# Altium PCB Register.PcbDoc
Units mil, origin at the board's own origin, x right, y up, seen from the top; angles counter-clockwise.
Board outline 5200 x 2700 mil, 2 copper layers (Top Layer, Bottom Layer); 45 components, 58 nets, 335 pads, 181 vias.
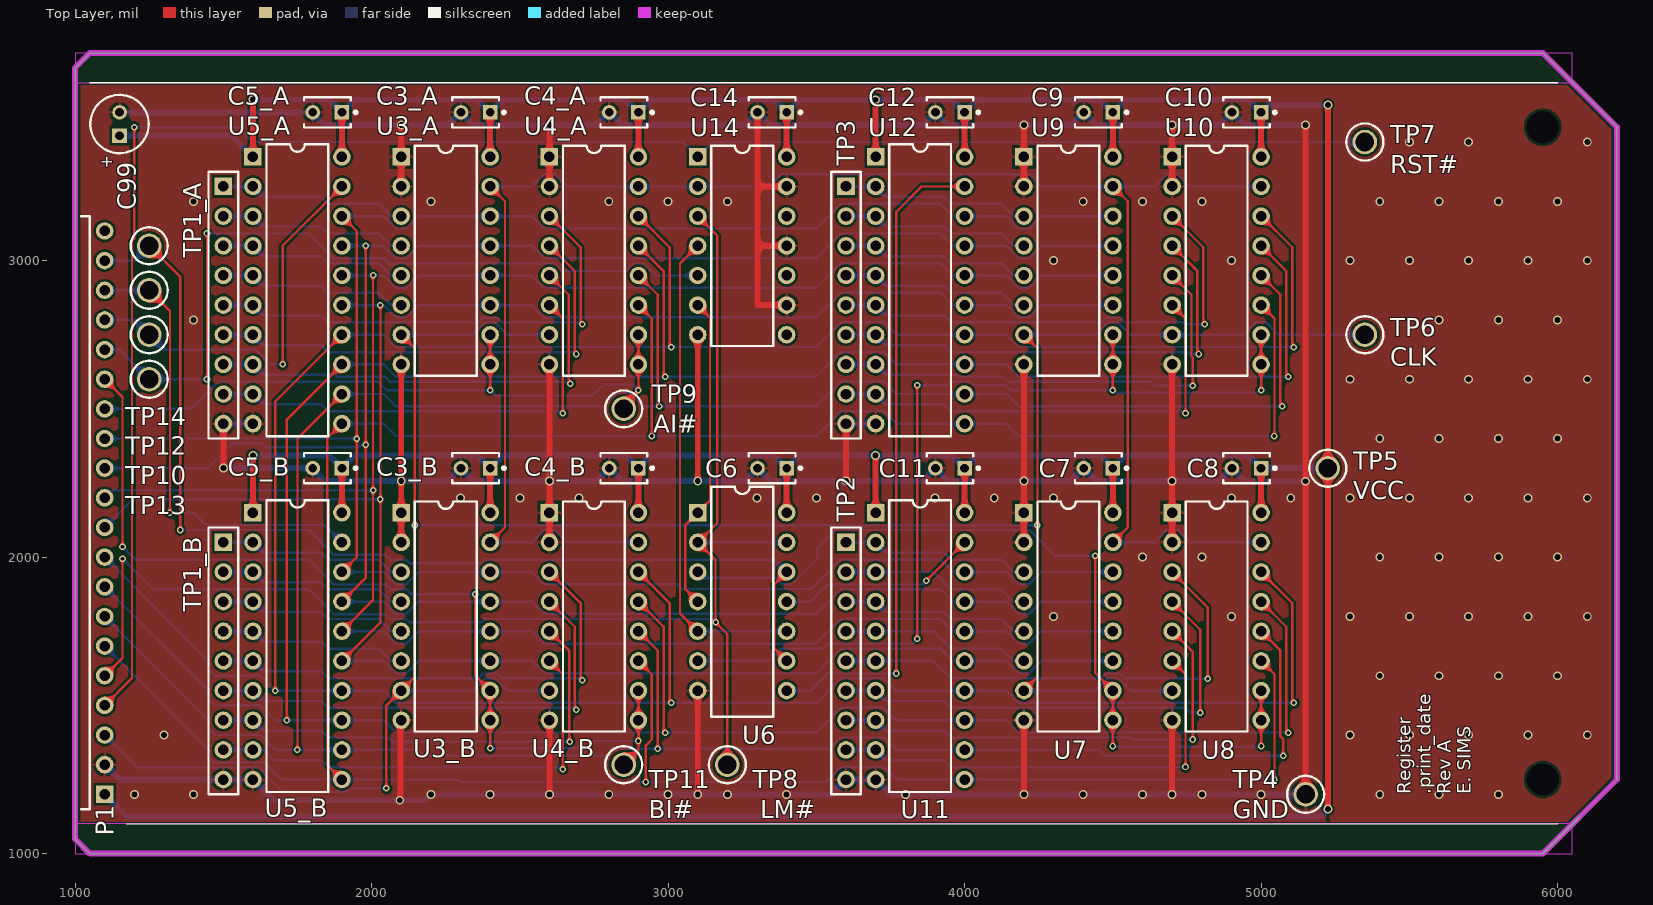
[diagram p0: Top Layer view]
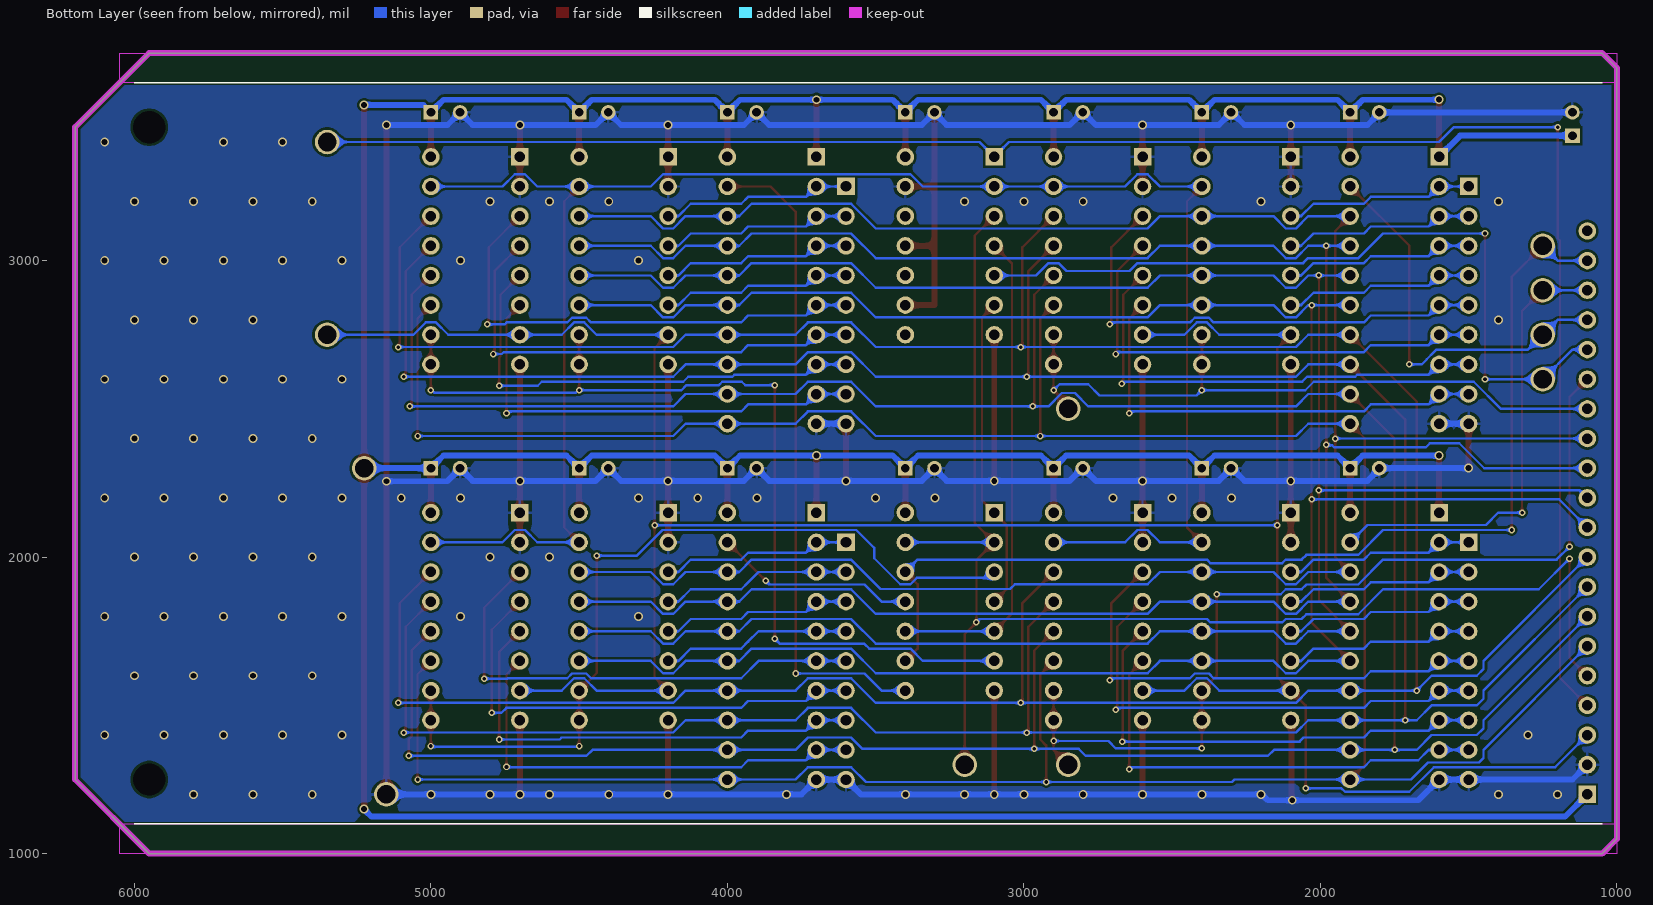
[diagram p1: Bottom Layer view, seen from below]

## Layer stack, top to bottom
Top Solder: solder mask 0.4, Solder Resist, Dk 3.5
Top Layer: signal copper 1.4
Dielectric 1: dielectric 12.6, FR-4, Dk 4.8
Bottom Layer: signal copper 1.4
Bottom Solder: solder mask 0.4, Solder Resist, Dk 3.5

## Board outline
1000,1050 1050,1000 5950,1000 6200,1250 6200,3450 5950,3700 1050,3700 1000,3650

## Design rules (kind name [scope] priority, off if disabled: settings)
BoardOutlineClearance [not isKeepout] p1: gap=10 ignorepadtopadclearanceinfootprint=FALSE
Clearance [All] p1: gap=8 ignorepadtopadclearanceinfootprint=FALSE
HoleSize [All] p1: absolutevalues=TRUE maxlimit=120 minlimit=12 maxpercent=80.000 minpercent=20.000
PolygonConnect [All] p1: thpad.connectstyle=Relief thpad.reliefconductorwidth=10 thpad.reliefentries=4 thpad.polygonreliefangle="90 Angle" thpad.airgapwidth=10 smdpad.connectstyle=Relief smdpad.reliefconductorwidth=10 smdpad.reliefentries=4 smdpad.polygonreliefangle="90 Angle" smdpad.airgapwidth=10 via.connectstyle=Direct via.reliefconductorwidth=10 via.reliefentries=4 via.polygonreliefangle="90 Angle" via.airgapwidth=10
RoutingVias "Schematic Routing Via Style" [InNetClass('PWR')] p1: holewidth=20 width=35 viastyle="Through Hole" minholewidth=20 minwidth=35 maxholewidth=20 maxwidth=50
RoutingVias [All] p2: holewidth=10 width=20 viastyle="Through Hole" minholewidth=10 minwidth=20 maxholewidth=10 maxwidth=20
SilkToSilkClearance [All] p1: silktosilkclearance=5
SolderMaskExpansion [All] p1: expansion=4 istentingtop=FALSE
UnRoutedNet [All] p1: checkbadconnections=TRUE
Width "Schematic Width Constraint" [InNetClass('PWR')] p1: maxlimit=50 minlimit=20 preferedwidth=20
Width [All] p2: maxlimit=8 minlimit=8 preferedwidth=8
27 further rules are at their usual default settings.

## Classes and differential pairs
net class PWR: GND VCC
net class REG[0..15]: REG0 REG1 REG2 REG3 REG4 REG5 REG6 REG7 REG8 REG9 REG10 REG11 REG12 REG13 REG14 REG15
net class BUS[0..7]: BUS0 BUS1 BUS2 BUS3 BUS4 BUS5 BUS6 BUS7
channel class Register_8B: A B
component class HL: C6 C7 C8 C9 C10 C11 C12 TP2 TP3 U6 U7 U8 U9 U10 U11 U12
component class B: C3_B C4_B C5_B TP1_B U3_B U4_B U5_B
component class A: C3_A C4_A C5_A TP1_A U3_A U4_A U5_A
component class Top: C14 C99 P1 TP4 TP5 TP6 TP7 TP8 TP9 TP10 TP11 TP12 TP13 TP14 U14

## Components (designator, comment, footprint, x,y, rotation, side; value= is the part's Value field where it differs from the comment)
C3_A "K104K15X7RF5TL2" VISH-K104K15X7RF5TL2 2350.79,3500 r180 top locked (schematic designator C3)
C3_B "K104K15X7RF5TL2" VISH-K104K15X7RF5TL2 2350.79,2300 r180 top locked (schematic designator C3)
C4_A "K104K15X7RF5TL2" VISH-K104K15X7RF5TL2 2850.79,3500 r180 top locked (schematic designator C4)
C4_B "K104K15X7RF5TL2" VISH-K104K15X7RF5TL2 2850.79,2300 r180 top locked (schematic designator C4)
C5_A "K104K15X7RF5TL2" VISH-K104K15X7RF5TL2 1850.79,3500 r180 top locked (schematic designator C5)
C5_B "K104K15X7RF5TL2" VISH-K104K15X7RF5TL2 1850.79,2300 r180 top locked (schematic designator C5)
C6 "K104K15X7RF5TL2" VISH-K104K15X7RF5TL2 3350.79,2300 r180 top locked
C7 "K104K15X7RF5TL2" VISH-K104K15X7RF5TL2 4450.79,2300 r180 top locked
C8 "K104K15X7RF5TL2" VISH-K104K15X7RF5TL2 4950.79,2300 r180 top locked
C9 "K104K15X7RF5TL2" VISH-K104K15X7RF5TL2 4450.79,3500 r180 top locked
C10 "K104K15X7RF5TL2" VISH-K104K15X7RF5TL2 4950.79,3500 r180 top locked
C11 "K104K15X7RF5TL2" VISH-K104K15X7RF5TL2 3950.79,2300 r180 top locked
C12 "K104K15X7RF5TL2" VISH-K104K15X7RF5TL2 3950.79,3500 r180 top locked
C14 "K104K15X7RF5TL2" VISH-K104K15X7RF5TL2 3350.79,3500 r180 top locked
C99 "Cap Pol5" C5x7 1150,3460.63 r90 top locked value=10uF
P1 "Header 20H" HDR1X20H 1100,1200 r90 top locked
TP1_A "Header 9" HDR1X9 1500,3250 r270 top locked (schematic designator TP1)
TP1_B "Header 9" HDR1X9 1500,2050 r270 top locked (schematic designator TP1)
TP2 "Header 9" HDR1X9 3600,2050 r270 top locked
TP3 "Header 9" HDR1X9 3600,3250 r270 top locked
TP4 "GND" KSTN-5011_V 5150,1200 r0 top
TP5 "VCC" KSTN-5011_V 5225,2300 r0 top
TP6 "CLK" KSTN-5011_V 5350,2750 r0 top
TP7 "RST#" KSTN-5011_V 5350,3400 r0 top
TP8 "LM#" KSTN-5011_V 3200,1300 r0 top
TP9 "AI#" KSTN-5011_V 2850,2500 r0 top
TP10 "AO#" KSTN-5011_V 1250,2750 r0 top
TP11 "BI#" KSTN-5011_V 2850,1300 r0 top
TP12 "BO#" KSTN-5011_V 1250,2900 r0 top
TP13 "HI#" KSTN-5011_V 1250,2600 r0 top
TP14 "HO#" KSTN-5011_V 1250,3050 r0 top
U3_A "SN74LS173AN" N016D 2250,3000 r270 top locked (schematic designator U3)
U3_B "SN74LS173AN" N016D 2250,1800 r270 top locked (schematic designator U3)
U4_A "SN74LS173AN" N016D 2750,3000 r270 top locked (schematic designator U4)
U4_B "SN74LS173AN" N016D 2750,1800 r270 top locked (schematic designator U4)
U5_A "SN74LS245N" N020 1750,2900 r270 top locked (schematic designator U5)
U5_B "SN74LS245N" N020 1750,1700 r270 top locked (schematic designator U5)
U6 "SN74LS00N" N014 3250,1850 r270 top locked
U7 "SN74LS173AN" N016D 4350,1800 r270 top locked
U8 "SN74LS173AN" N016D 4850,1800 r270 top locked
U9 "SN74LS173AN" N016D 4350,3000 r270 top locked
U10 "SN74LS173AN" N016D 4850,3000 r270 top locked
U11 "SN74LS245N" N020 3850,1700 r270 top locked
U12 "SN74LS245N" N020 3850,2900 r270 top locked
U14 "SN74LS04N" N014 3250,3050 r270 top locked

## Footprints (in the part's own frame and the unit in brackets; to place one, negate y for a bottom-side part, rotate by r counter-clockwise, add the part's x,y. Pads: shape width x height; smd on the part's side, far side on the other; paste and mask are expansions set on the pad)
C5x7 [mm] "Capacitor; 2 Leads"
  rect 1.25x1.25 hole 0.75: 1(-1,0)
  round 1.25 hole 0.75: 2(1,0)
  silkscreen extent -2.5,-2.5 2.5,2.5, body extent -2.5,-2.5 2.5,2.5, height 7
HDR1X9 [mm] "Connector; Header; 9 Position"
  rect 1.5x1.5 hole 0.9: 1(0,0)
  round 1.5 hole 0.9: 2(2.54,0) 3(5.08,0) 4(7.62,0) 5(10.16,0) 6(12.7,0) 7(15.24,0) 8(17.78,0) 9(20.32,0)
  silkscreen extent -1.27,-1.27 21.59,1.27
HDR1X20H [mm] "Connector; Header; 20 Position; Right Angle"
  rect 1.5x1.5 hole 0.9: 1(0,0)
  round 1.5 hole 0.9: 2(2.54,0) 3(5.08,0) 4(7.62,0) 5(10.16,0) 6(12.7,0) 7(15.24,0) 8(17.78,0) 9(20.32,0) 10(22.86,0) 11(25.4,0) 12(27.94,0) 13(30.48,0) 14(33.02,0) 15(35.56,0) 16(38.1,0) 17(40.64,0) 18(43.18,0) 19(45.72,0) 20(48.26,0)
  silkscreen extent -1.27,1.27 49.53,2.03
KSTN-5011_V [mm] "Test Point, Dia 3.17mm"
  round 2.1 hole 1.6: 1(0,0)
  silkscreen extent -1.59,-1.58 1.59,1.58, body extent -1.59,-1.59 1.59,1.59, height 8.13
N014 [mm] "DIP; 14 Leads; Row Spacing 7.62 mm; Pitch 2.54 mm"
  rect 1.5x1.5 hole 0.9: 1(-7.62,-3.81)
  round 1.5 hole 0.9: 2(-5.08,-3.81) 3(-2.54,-3.81) 4(0,-3.81) 5(2.54,-3.81) 6(5.08,-3.81) 7(7.62,-3.81) 8(7.62,3.81) 9(5.08,3.81) 10(2.54,3.81) 11(0,3.81) 12(-2.54,3.81) 13(-5.08,3.81) 14(-7.62,3.81)
  silkscreen extent -9.85,-2.65 9.85,2.65, body extent -9.15,-5.08 9.15,5.12, height 7.88
N016D [mm] "DIP; 16 Leads; Row Spacing 7.62 mm; Pitch 2.54 mm"
  rect 1.5x1.5 hole 0.9: 1(-8.89,-3.81)
  round 1.5 hole 0.9: 2(-6.35,-3.81) 3(-3.81,-3.81) 4(-1.27,-3.81) 5(1.27,-3.81) 6(3.81,-3.81) 7(6.35,-3.81) 8(8.89,-3.81) 9(8.89,3.81) 10(6.35,3.81) 11(3.81,3.81) 12(1.27,3.81) 13(-1.27,3.81) 14(-3.81,3.81) 15(-6.35,3.81) 16(-8.89,3.81)
  silkscreen extent -9.85,-2.65 9.85,2.65, body extent -10.46,-5.08 10.46,5.12, height 7.88
N020 [mm] "DIP; 20 Leads; Row Spacing 7.62 mm; Pitch 2.54 mm"
  rect 1.5x1.5 hole 0.9: 1(-11.43,-3.81)
  round 1.5 hole 0.9: 2(-8.89,-3.81) 3(-6.35,-3.81) 4(-3.81,-3.81) 5(-1.27,-3.81) 6(1.27,-3.81) 7(3.81,-3.81) 8(6.35,-3.81) 9(8.89,-3.81) 10(11.43,-3.81) 11(11.43,3.81) 12(8.89,3.81) 13(6.35,3.81) 14(3.81,3.81) 15(1.27,3.81) 16(-1.27,3.81) 17(-3.81,3.81) 18(-6.35,3.81) 19(-8.89,3.81) 20(-11.43,3.81)
  silkscreen extent -12.5,-2.65 12.5,2.65, body extent -13.08,-5.08 13.08,5.12, height 7.88
VISH-K104K15X7RF5TL2 [mm] "THD, 2-Leads, Body 4x2.6mm"
  rect 1.25x1.25 hole 0.75: 1(-1.25,0)
  round 1.25 hole 0.75: 2(1.25,0)
  silkscreen extent -2.55,-1.3 2,1.3, body extent -2,-1.3 2,1.3, height 5.6

## Part data
C3_A C3_B C4_A C4_B C5_A C5_B C6 C7 C8 C9 C10 C11 C12 C14: library part CMP-2000-06508-1, "Ceramic Capacitor, 100 nF, +/- 10%, 50 V, -55 to 125 degC, 2-Pin THD, RoHS, Tape and Reel", Capacitance=0.1µF, Manufacturer=Vishay, Operating Temperature=-55°C~125°C, Package / Case=Radial, Package Description="2-Pin Through Hole Device, Body 4 x 2.6 mm", Ratings=-, Standard Package=1, Temperature Coefficient=X7R, Tolerance=±10%, Voltage - Rated=50V, Applications=GeneralPurpose, Catalog Drawings=Mono-KapSide2-15_5.58Mono-KapSide1_15, Category=Capacitors, Datasheet URL=http://www.vishay.com/docs/45171/kseries.pdf, Datasheet Version=08/2013, Family=CeramicCapacitors, Features=-, Height - Seated (Max)="0.220\"(5.58mm)", Lead Spacing="0.098\"(2.50mm)", Lead Style=Straight, Manufacturer URL=http://www.vishay.com/, Mounting Technology=ThroughHole, Mounting Type=ThroughHole, Online Catalog=Mono-Kap™Series, Other Names=BC1084CT, Package Reference=K104K15X7RF5TL2, Packaging=CutTape(CT), Series=Mono-Kap™K, Size / Dimension="0.157\"Lx0.098\"W(4.00mmx2.50mm)", Thickness (Max)=-
C99: "Polarized Capacitor", LatestRevisionDate=17-Jul-2002, LatestRevisionNote="Re-released for DXP Platform.", PackageDescription="Polarized Capacitor; 2 Leads", PackageReference=POLAR0.8, Published=8-Jun-2000, Publisher="Altium Limited"
P1: "Header, 20-Pin, Right Angle", LatestRevisionDate=17-Jul-2002, LatestRevisionNote="Re-released for DXP Platform.", Publisher="Altium Limited", System=Connector
TP1_A TP1_B TP2 TP3: "Header, 9-Pin", LatestRevisionDate=17-Jul-2002, LatestRevisionNote="Re-released for DXP Platform.", Publisher="Altium Limited"
TP4 TP5 TP6 TP7 TP8 TP9 TP10 TP11 TP12 TP13 TP14: library part TP
U3_A U3_B U4_A U4_B U7 U8 U9 U10: "4-Bit D-Type Register with 3-State Outputs", Code_JEDEC=MS-001-BB, ComponentLink1Description="Manufacturer Link", ComponentLink1URL=http://www.ti.com/, ComponentLink2Description=Datasheet, ComponentLink2URL=http://www-s.ti.com/sc/ds/sn74ls173a.pdf, DatasheetVersion=Mar-1988, LatestRevisionDate=04-Mar-2005, LatestRevisionNote="Stylized 3D Model Added.", PackageDescription="DIP; 16 Leads; Row Spacing 7.62 mm; Pitch 2.54 mm", PackageReference=N016D, PackageVersion=Oct-1995, Published=8-Jun-2000, Publisher="Altium Limited"
U5_A U5_B U11 U12: "Octal Bus Transceiver with 3-State Outputs", ComponentLink1Description="Manufacturer Link", ComponentLink1URL=http://www.ti.com/, ComponentLink2Description=Datasheet, ComponentLink2URL=http://www-s.ti.com/sc/ds/sn74ls245.pdf, DatasheetVersion=Mar-1988, LatestRevisionDate=04-Mar-2005, LatestRevisionNote="Stylized 3D Model Added.", PackageDescription="DIP; 20 Leads; Row Spacing 7.62 mm; Pitch 2.54 mm", PackageReference=N020, PackageVersion=Oct-1995, Published=8-Jun-2000, Publisher="Altium Limited"
U6: "Quadruple 2-Input Positive-NAND Gate", ComponentLink1Description="Manufacturer Link", ComponentLink1URL=http://www.ti.com/, ComponentLink2Description=Datasheet, ComponentLink2URL=http://www-s.ti.com/sc/ds/sn74ls00.pdf, DatasheetVersion=Mar-1988, LatestRevisionDate=04-Mar-2005, LatestRevisionNote="Stylized 3D Model Added.", PackageDescription="DIP; 14 Leads; Row Spacing 7.62 mm; Pitch 2.54 mm", PackageReference=N014, PackageVersion=Oct-1995, Published=8-Jun-2000, Publisher="Altium Limited"
U14: "Hex Inverter", ComponentLink1Description="Manufacturer Link", ComponentLink1URL=http://www.ti.com/, ComponentLink2Description=Datasheet, ComponentLink2URL=http://www-s.ti.com/sc/ds/sn74ls04.pdf, DatasheetVersion=Mar-1988, LatestRevisionDate=04-Mar-2005, LatestRevisionNote="Stylized 3D Model Added.", PackageDescription="DIP; 14 Leads; Row Spacing 7.62 mm; Pitch 2.54 mm", PackageReference=N014, PackageVersion=Oct-1995, Published=8-Jun-2000, Publisher="Altium Limited"

## Free pads (board coordinates)
  round 0 hole 109: ""(5950,1250) ""(5950,3450)

## Via types
v1: diameter 30, hole 20, Top Layer to Bottom Layer, tented both sides, 113 vias
v2: diameter 22, hole 12, Top Layer to Bottom Layer, tented both sides, 68 vias

## Nets (pads, with @x,y where several pads share a name; then routed paths per layer and width w, separated by ;. In a path a pad name is that pad's centre, name@x,y a point inside that pad or via, vN(x,y) a via of type N, cw(c..) or ccw(c..) an arc to the next point about the centre after c; other vN are vias at no path point)
AI#: P1.14 TP9.1 U3_A.9 U3_A.10 U4_A.9 U4_A.10 | length 2339.1
  Top Layer w8: v2(2400,2563) U3_A.9 U3_A.10 ; TP9.1 2850,2513 v2(2900,2563) U4_A.9 U4_A.10
  Bottom Layer w8: P1.14 1391.27,2500 1482.8,2591.53 1517.2,2591.53 2022.37,2591.53 2050.9,2563 v2(2400,2563) 2418,2545 2745,2545 2783.2,2583.2 2879.8,2583.2 v2(2900,2563)
AO#: P1.17 TP10.1 U5_A.19 | length 1345.1
  Top Layer w8: v2(1700,2650) 1700,3050 U5_A.19
  Bottom Layer w8: P1.17 1200,2800 TP10.1 1300,2700 1608.52,2700 1616.99,2691.53 1617.2,2691.53 1641.53,2667.2 1641.53,2666.99 1658.52,2650 v2(1700,2650)
BI#: P1.15 TP11.1 U3_B.9 U3_B.10 U4_B.9 U4_B.10 | length 3167.9
  Top Layer w8: P1.15 1160,2540 v2(1160,2035) ; v2(2350,1875) 2350,1600 U3_B.10 v2(2400,1355) ; TP11.1 2900,1350 v2(2900,1380) U4_B.9 U4_B.10
  Bottom Layer w8: v2(1160,2035) 1203.47,1991.53 1788.47,1991.53 1872.47,1907.53 2047.47,1907.53 2063.47,1891.53 2117.2,1891.53 2133.73,1875 v2(2350,1875) ; v2(2400,1355) 2690,1355 2715,1380 v2(2900,1380)
BO#: P1.18 TP12.1 U5_B.19 | length 1550.4
  Top Layer w8: TP12.1 1320,2830 v2(1320,2150)
  Bottom Layer w8: P1.18 TP12.1 ; v2(1320,2150) 1400,2150 1441.53,2108.47 1841.53,2108.47 U5_B.19
BUS0: P1.13 U3_A.14 U3_B.14 U5_A.18 U5_B.18 U7.14 U9.14 U11.18 U12.18 | length 7579.9
  Top Layer w8: U5_B.18 1950,2000 v2(1950,2400) 1950,3100 U5_A.18
  Bottom Layer w8: P1.13 v2(1950,2400) ; U5_B.18 2041.27,1950 2082.8,1908.47 2117.2,1908.47 2158.73,1950 U3_B.14 2541.27,1950 2582.8,1908.47 3030.47,1908.47 3046.47,1892.47 3483.74,1892.47 3582.8,1991.53 3918.47,1991.53 3960,1950 U11.18 4141.27,1950 4182.8,1908.47 4217.2,1908.47 4258.73,1950 U7.14 ; U5_A.18 2041.27,3150 2082.8,3108.47 2117.2,3108.47 2158.73,3150 U3_A.14 2541.27,3150 2582.8,3108.47 3499.74,3108.47 3582.8,3191.53 3918.47,3191.53 3960,3150 U12.18 4141.27,3150 4182.8,3108.47 4217.2,3108.47 4258.73,3150 U9.14
BUS1: P1.12 U3_A.13 U3_B.13 U5_A.17 U5_B.17 U7.13 U9.13 U11.17 U12.17 | length 7632.9
  Top Layer w8: U5_B.17 1980,1930 v2(1980,3050)
  Bottom Layer w8: P1.12 1447.67,2300 1531.67,2384 1631,2384 1645,2370 1953,2370 1959.83,2376.83 1977.32,2376.83 v2(1980,2379.51) ; U5_B.17 2041.27,1850 2082.8,1808.47 2117.2,1808.47 2158.73,1850 U3_B.13 2541.27,1850 2582.8,1808.47 3499.74,1808.47 3582.8,1891.53 3918.47,1891.53 3960,1850 U11.17 4141.27,1850 4182.8,1808.47 4217.2,1808.47 4258.73,1850 U7.13 ; U5_A.17 v2(1980,3050) 2041.27,3050 2082.8,3008.47 2117.2,3008.47 2158.73,3050 U3_A.13 2541.27,3050 2582.8,3008.47 3499.74,3008.47 3582.8,3091.53 3918.47,3091.53 3960,3050 U12.17 4141.27,3050 4182.8,3008.47 4217.2,3008.47 4258.73,3050 U9.13
BUS2: P1.11 U3_A.12 U3_B.12 U5_A.16 U5_B.16 U7.12 U9.12 U11.16 U12.16 | length 7634.1
  Top Layer w8: U5_B.16 2005,1855 v2(2005,2950)
  Bottom Layer w8: P1.11 1125,2225 v2(2005,2225) ; U5_B.16 2041.27,1750 2082.8,1708.47 2117.2,1708.47 2158.73,1750 U3_B.12 2541.27,1750 2582.8,1708.47 3499.74,1708.47 3582.8,1791.53 3918.47,1791.53 3960,1750 U11.16 4141.27,1750 4182.8,1708.47 4217.2,1708.47 4258.73,1750 U7.12 ; U5_A.16 v2(2005,2950) 2041.27,2950 2082.8,2908.47 2117.2,2908.47 2158.73,2950 U3_A.12 2541.27,2950 2582.8,2908.47 3499.74,2908.47 3582.8,2991.53 3918.47,2991.53 3960,2950 U12.16 4141.27,2950 4182.8,2908.47 4217.2,2908.47 4258.73,2950 U9.12
BUS3: P1.10 U3_A.11 U3_B.11 U5_A.15 U5_B.15 U7.11 U9.11 U11.15 U12.15 | length 7698.4
  Top Layer w8: U5_B.15 2030,1780 v2(2030,2195) v2(2030,2850)
  Bottom Layer w8: P1.10 1195,2195 v2(2030,2195) ; U5_B.15 2041.27,1650 2082.8,1608.47 2117.2,1608.47 2158.73,1650 U3_B.11 2541.27,1650 2582.8,1608.47 3499.74,1608.47 3582.8,1691.53 3918.47,1691.53 3960,1650 U11.15 4141.27,1650 4182.8,1608.47 4217.2,1608.47 4258.73,1650 U7.11 ; U5_A.15 v2(2030,2850) 2041.27,2850 2082.8,2808.47 2117.2,2808.47 2158.73,2850 U3_A.11 2541.27,2850 2582.8,2808.47 3499.74,2808.47 3582.8,2891.53 3918.47,2891.53 3960,2850 U12.15 4141.27,2850 4182.8,2808.47 4217.2,2808.47 4258.73,2850 U9.11
BUS4: P1.9 U4_A.14 U4_B.14 U5_A.14 U5_B.14 U8.14 U10.14 U11.14 U12.14 | length 10838.6
  Top Layer w8: v2(1675,1550) 1675,2525 U5_A.14 ; U4_B.14 3005,1845 3005,1514.16 v2(3010.68,1508.47) ; U4_A.14 3005,3045 3005,2714.16 v2(3010.68,2708.47) ; U8.14 5105,1845 5105,1514.16 v2(5110.68,1508.47) ; U10.14 5105,3045 5105,2714.16 v2(5110.68,2708.47)
  Bottom Layer w8: P1.9 1450,1650 1450,1622.51 1472.51,1600 1625,1600 v2(1675,1550) U5_B.14 2041.27,1550 2082.8,1508.47 3499.74,1508.47 3582.8,1591.53 3728.47,1591.53 3770,1550 U11.14 4141.27,1550 4182.8,1508.47 v2(5110.68,1508.47) ; U5_A.14 2041.27,2750 2082.8,2708.47 v2(3010.68,2708.47) 3499.74,2708.47 3582.8,2791.53 3728.47,2791.53 3770,2750 U12.14 4141.27,2750 4182.8,2708.47 v2(5110.68,2708.47)
BUS5: P1.8 U4_A.13 U4_B.13 U5_A.13 U5_B.13 U8.13 U10.13 U11.13 U12.13 | length 10750
  Top Layer w8: v2(1714.49,1450) 1714.49,2464.49 U5_A.13 ; U4_B.13 2985,1765 2985,1414.4 v2(2990.92,1408.47) ; U4_A.13 2985,2965 2985,2614.4 v2(2990.92,2608.47) ; U8.13 5085,1765 5085,1414.4 v2(5090.92,1408.47) ; U10.13 5085,2965 5085,2614.4 v2(5090.92,2608.47)
  Bottom Layer w8: P1.8 1450,1550 1450,1522.51 1472.51,1500 1625,1500 1675,1450 v2(1714.49,1450) U5_B.13 2041.27,1450 2082.8,1408.47 3499.74,1408.47 3582.8,1491.53 3728.47,1491.53 3770,1450 U11.13 4141.27,1450 4182.8,1408.47 v2(5090.92,1408.47) ; U5_A.13 2041.27,2650 2082.8,2608.47 v2(2990.92,2608.47) 3499.74,2608.47 3582.8,2691.53 3728.47,2691.53 3770,2650 U12.13 4141.27,2650 4182.8,2608.47 v2(5090.92,2608.47)
BUS6: P1.7 U4_A.12 U4_B.12 U5_A.12 U5_B.12 U8.12 U10.12 U11.12 U12.12 | length 10607.6
  Top Layer w8: v2(1750,1350) 1750,2400 U5_A.12 ; U4_B.12 2965,1685 v2(2965,1353.34) ; U4_A.12 2965,2885 2965,2514.08 v2(2970.6,2508.47) ; U8.12 5065,1685 5065,1395.51 5074.08,1386.44 v2(5074.08,1330) ; U10.12 5065,2885 5065,2514.08 v2(5070.6,2508.47)
  Bottom Layer w8: P1.7 1450,1450 1450,1422.51 1472.51,1400 1625,1400 1675,1350 v2(1750,1350) U5_B.12 2156.67,1350 2176.67,1330 2791.76,1330 2815.1,1353.34 v2(2965,1353.34) 3544.61,1353.34 3582.8,1391.53 3728.47,1391.53 3770,1350 U11.12 4455,1350 4475,1330 v2(5074.08,1330) ; U5_A.12 2041.27,2550 2082.8,2508.47 2783.04,2508.47 2827.91,2553.34 2872.09,2553.34 2916.96,2508.47 v2(2970.6,2508.47) 3499.74,2508.47 3582.8,2591.53 3728.47,2591.53 3770,2550 U12.12 4141.27,2550 4182.8,2508.47 v2(5070.6,2508.47)
BUS7: P1.6 U4_A.11 U4_B.11 U5_A.11 U5_B.11 U8.11 U10.11 U11.11 U12.11 | length 10435.2
  Top Layer w8: U5_B.11 1850.79,1299.21 1850.79,2400.79 U5_A.11 ; U4_B.11 2945,1605 2945,1385 2925,1365 2925,1241.98 v2(2924.57,1241.55) ; U4_A.11 2945,2805 v2(2945,2408.47) ; U8.11 5045,1605 v2(5045,1250) ; U10.11 5045,2805 v2(5045,2408.47)
  Bottom Layer w8: P1.6 1450,1350 1450,1322.51 1464.98,1307.53 1523.83,1307.53 1637.47,1307.53 1695,1250 U5_B.11 2289.35,1250 2297.79,1241.55 v2(2924.57,1241.55) 3532.82,1241.55 3582.8,1291.53 3728.47,1291.53 3770,1250 U11.11 v2(5045,1250) ; U5_A.11 2041.27,2450 2082.8,2408.47 3499.74,2408.47 3582.8,2491.53 3728.47,2491.53 3770,2450 U12.11 4141.27,2450 4182.8,2408.47 v2(5045,2408.47)
CLK: P1.3 TP6.1 U3_A.7 U3_B.7 U4_A.7 U4_B.7 U7.7 U8.7 U9.7 U10.7 | length 8782.5
  Top Layer w8: v2(2050,1220) 2050,1500 2145.67,1595.67 2145.67,2704.33 U3_A.7 ; U7.7 4245.67,1595.67 4245.67,2704.33 U9.7
  Bottom Layer w8: P1.3 1208.47,1291.53 1517.2,1291.53 1617.2,1291.53 1700.26,1208.47 1917.2,1208.47 1928.73,1220 v2(2050,1220) ; U3_B.7 2341.27,1550 2382.8,1591.53 2417.2,1591.53 2458.73,1550 U4_B.7 ; U3_A.7 2341.27,2750 2382.8,2791.53 2417.2,2791.53 2458.73,2750 U4_A.7 ; v2(2145.67,2107.53) v2(4245.67,2107.53) ; U7.7 4441.27,1550 4482.8,1591.53 4517.2,1591.53 4558.73,1550 U8.7 ; U9.7 4441.27,2750 4482.8,2791.53 4517.2,2791.53 4558.73,2750 U10.7 4941.27,2750 4982.8,2791.53 5017.2,2791.53 5058.73,2750 TP6.1
GND: C3_A.2 C3_B.2 C4_A.2 C4_B.2 C5_A.2 C5_B.2 C6.2 C7.2 C8.2 C9.2 C10.2 C11.2 C12.2 C14.2 C99.2 P1.2 TP1_A.9 TP1_B.9 TP2.9 TP3.9 TP4.1 U3_A.1 U3_A.2 U3_A.8 U3_B.1 U3_B.2 U3_B.8 U4_A.1 U4_A.2 U4_A.8 U4_B.1 U4_B.2 U4_B.8 U5_A.10 U5_B.10 U6.7 U7.1 U7.2 U7.8 U8.1 U8.2 U8.8 U9.1 U9.2 U9.8 U10.1 U10.2 U10.8 U11.10 U12.10 U14.7 U14.9 U14.11 U14.13 | length 21095.1
  Top Layer w20: v1(1500,2300) TP1_A.9 ; v1(2095,1180) 2096.91,1181.91 2096.91,1446.91 U3_B.8 ; U3_B.2 U3_B.1 ; v1(2100,2257.39) U3_A.8 ; U3_A.2 U3_A.1 ; U3_B.1@2100.16,2150.16 v1@2100.16,2257.24 ; U3_A.1@2100.16,3350.16 v1@2100.16,3457.24 ; v1(2600,1200) U4_B.8 ; U4_B.2 U4_B.1 ; v1(2600,2257.39) U4_A.8 ; U4_A.2 U4_A.1 ; U4_B.1@2600.16,2150.16 v1@2600.16,2257.24 ; U4_A.1@2600.16,3350.16 v1@2600.16,3457.24 ; v1(3100,1200) U6.7 ; v1(3100,2257.39) U14.7 ; C14.2 3301.57,3250 ; U14.9 3301.57,2850 3301.57,3050 ; U14.11 3301.57,3050 ; U14.13 3301.57,3250 ; v1(3600,2257.39) TP3.9 ; v1(4200,1200) U7.8 ; U7.2 U7.1 ; v1(4200,2257.39) U9.8 ; U9.2 U9.1 ; U7.1@4200.16,2150.16 v1@4200.16,2257.24 ; U9.1@4200.16,3350.16 v1@4200.16,3457.24 ; v1(4700,1200) U8.8 ; U8.2 U8.1 ; v1(4700,2257.39) U10.8 ; U10.2 U10.1 ; U8.1@4700.16,2150.16 v1@4700.16,2257.24 ; U10.1@4700.16,3350.16 v1@4700.16,3457.24 ; TP4.1 v1(5150,2255.97) v1(5150,3457.39) ; 3301.57,3050 3301.57,3250
  Bottom Layer w20: P1.2 1150,1250 TP1_B.9 U5_B.10 1670,1180 v1(2095,1180) 2177.29,1180 2197.29,1200 v1(2400,1200) v1(2600,1200) v1(2800,1200) v1(3000,1200) v1(3100,1200) 3550,1200 TP2.9 U11.10 3750,1200 v1(4200,1200) v1(4700,1200) TP4.1 ; C99.2 C5_A.2@1798.43,3500 ; v1(1500,2300) C5_B.2@1798.43,2300 ; TP1_A.9 U5_A.10 ; C5_B.2 C5_B.2@1798.43,2300 ; C5_A.2 C5_A.2@1798.43,3500 ; C3_B.2@2298.43,2300 2255.82,2257.39 v1(2100,2257.39) 1841.03,2257.39 C5_B.2@1798.43,2300 ; C3_A.2@2298.43,3500 2255.82,3457.39 v1(2100,3457.39) 1841.03,3457.39 C5_A.2@1798.43,3500 ; C3_B.2@2300,2300 2342.61,2257.39 v1(2600,2257.39) 2757.39,2257.39 C4_B.2@2800,2300 ; C3_A.2@2300,3500 2342.61,3457.39 v1(2600,3457.39) 2757.39,3457.39 C4_A.2@2800,3500 ; C4_B.2@2803.15,2300 2845.76,2257.39 v1(3100,2257.39) 3260.54,2257.39 C6.2@3302.36,2299.21 ; C4_A.2@2803.15,3500 2845.76,3457.39 3260.54,3457.39 C14.2@3302.36,3499.21 ; C6.2 C6.2@3302.36,2299.21 ; C14.2 C14.2@3302.36,3499.21 ; C6.2@3303.15,2300 C6.2@3302.36,2299.21 ; C14.2@3303.15,3500 C14.2@3302.36,3499.21 ; TP3.9 U12.10 ; C8.2 4858.97,2257.39 v1(4700,2257.39) 4444.18,2257.39 C7.2 4358.97,2257.39 v1(4200,2257.39) 3944.18,2257.39 C11.2 3858.97,2257.39 v1(3600,2257.39) 3344.18,2257.39 C6.2@3302.36,2299.21 ; C8.2@4901.76,2298.58 4944.36,2255.97 v1(5150,2255.97) ; v1(5150,3457.39) 4944.18,3457.39 C10.2 4858.97,3457.39 v1(4700,3457.39) 4444.18,3457.39 C9.2 4358.97,3457.39 v1(4200,3457.39) 3944.18,3457.39 C12.2 3858.97,3457.39 3344.18,3457.39 C14.2@3302.36,3499.21
  other v1: 1200,1200 1400,1200 2200,1200 3200,1200 3400,1200 3800,1200 4400,1200 4600,1200 4800,1200 5000,1200 5400,1200 5600,1200 5800,1200 1300,1400 5300,1400 5500,1400 5700,1400 5900,1400 6100,1400 5400,1600 5600,1600 5800,1600 6000,1600 4300,1800 4900,1800 5300,1800 5500,1800 5700,1800 5900,1800 6100,1800 4600,2000 4800,2000 5400,2000 5600,2000 5800,2000 6000,2000 2300,2200 2500,2200 2700,2200 3300,2200 3500,2200 3900,2200 4100,2200 4300,2200 4900,2200 5100,2200 5300,2200 5500,2200 5700,2200 5900,2200 6100,2200 5400,2400 5600,2400 5800,2400 6000,2400 5300,2600 5500,2600 5700,2600 5900,2600 6100,2600 1400,2800 5600,2800 5800,2800 6000,2800 4300,3000 4900,3000 5300,3000 5500,3000 5700,3000 5900,3000 6100,3000 1400,3200 2200,3200 2800,3200 3000,3200 3200,3200 4400,3200 4600,3200 4800,3200 5400,3200 5600,3200 5800,3200 6000,3200 5500,3400 5700,3400 6100,3400
HI: U6.1 U6.4 U14.6 | length 1068.8
  Top Layer w8: U6.4 3058.47,1891.53 3058.47,2108.47 U6.1 3141.53,2191.53 3141.53,2732.8 3141.53,2808.47 U14.6
HI#: P1.16 TP13.1 U14.5 | length 2613.5
  Top Layer w8: v2(1445,2600) v2(1445,3091.53)
  Bottom Layer w8: P1.16 1150,2700 TP13.1 v2(1445,2600) ; v2(1445,3091.53) 1788.47,3091.53 1871.53,3008.47 2041.53,3008.47 2058.47,2991.53 2617.2,2991.53 2643.73,2965 2856.27,2965 2882.8,2991.53 2917.2,2991.53 2958.73,2950 U14.5
HO#: P1.19 TP14.1 U6.9 U6.12 | length 3620.3
  Top Layer w8: TP14.1 1355.09,2944.91 v2@1355.09,2091.53 ; U6.9 3358.47,1691.53 3358.47,1908.47 U6.12
  Bottom Layer w8: P1.19 1200,3000 TP14.1 ; v2(1355,2091.53) 1788.47,2091.53 1872.47,2007.53 2047.47,2007.53 2063.47,1991.53 2117.2,1991.53 2128.73,1980 2371.27,1980 2382.8,1991.53 3358.47,1991.53 U6.12
LM: U6.5 U6.10 U14.4 | length 1649.7
  Top Layer w8: U6.5 3040,1810 3040,2990 U14.4
  Bottom Layer w8: U6.5 U6.10
LM#: P1.5 TP8.1 U6.2 U6.13 U14.3 | length 4764.2
  Top Layer w8: P1.5 1160,1660 v2(1160,1995) ; U14.3 3165.63,3084.37 3165.63,2115.63 U6.2 3160,1990 v2(3160,1780) 3200,1740 TP8.1
  Bottom Layer w8: v2(1160,1995) 1263.47,1891.53 1788.47,1891.53 1872.47,1807.53 2047.47,1807.53 2063.47,1791.53 2117.2,1791.53 2128.73,1780 2371.27,1780 2382.8,1791.53 3148.47,1791.53 v2(3160,1780) ; U6.2 U6.13
LOAD_LSB#: U6.3 U7.9 U7.10 U8.9 U8.10 | length 2845.6
  Top Layer w8: v2(4440,2005) 4440,1610 U7.10 U7.9 v2(4500,1363) ; v2(5000,1363) U8.9 U8.10
  Bottom Layer w8: U6.3 3120,1930 3361.27,1930 3382.8,1908.47 3417.2,1908.47 3505,1996.27 3505,2031.03 3565.5,2091.53 4218.47,2091.53 4305,2005 v2(4440,2005) ; v2(4500,1363) 4502.68,1360.32 4511.36,1360.32 4511.69,1360 4993.21,1360 4996.21,1363 v2(5000,1363)
LOAD_MSB#: U6.6 U9.9 U9.10 U10.9 U10.10 | length 3183.3
  Top Layer w8: v2(3840,1725) v2(3840,2580) ; v2(4500,2563) U9.9 U9.10 ; v2(5000,2563) U10.9 U10.10
  Bottom Layer w8: U6.6 3341.27,1650 3382.8,1691.53 3521.53,1691.53 3537.53,1707.53 3822.53,1707.53 v2(3840,1725) ; v2(3840,2580) 3940,2580 3951.53,2591.53 4017.2,2591.53 4028.73,2580 4138.07,2580 4155.07,2563 4503.69,2563 4511.69,2555 4988.31,2555 4996.31,2563 v2(5000,2563)
OUT_LSB#: U6.11 U11.19 | length 682.8
  Top Layer w8: v2(3870,1920) U11.19
  Bottom Layer w8: U6.11 3480,1850 3537.53,1907.53 3857.53,1907.53 v2(3870,1920)
OUT_MSB#: U6.8 U12.19 | length 2216.5
  Top Layer w8: v2(3770,1607.53) 3770,3165 3855,3250 U12.19
  Bottom Layer w8: U6.8 3480,1550 3537.53,1607.53 v2(3770,1607.53)
REG0: TP2.1 U7.3 U11.2 | length 641.4
  Bottom Layer w8: TP2.1 U11.2 3735,2015 3930,2015 3953.47,1991.53 4123.47,1991.53 4165,1950 U7.3
REG0_A: TP1_A.1 U3_A.3 U5_A.2 | length 641.4
  Bottom Layer w8: TP1_A.1 U5_A.2 1635,3215 1830,3215 1853.47,3191.53 2023.47,3191.53 2065,3150 U3_A.3
REG0_B: TP1_B.1 U3_B.3 U5_B.2 | length 641.4
  Bottom Layer w8: TP1_B.1 U5_B.2 1635,2015 1830,2015 1853.47,1991.53 2023.47,1991.53 2065,1950 U3_B.3
REG1: TP2.2 U7.4 U11.3 | length 641.4
  Bottom Layer w8: TP2.2 U11.3 3895,1950 3930,1915 3953.47,1891.53 4123.47,1891.53 4165,1850 U7.4
REG1_A: TP1_A.2 U3_A.4 U5_A.3 | length 641.4
  Bottom Layer w8: TP1_A.2 U5_A.3 1635,3115 1830,3115 1853.47,3091.53 2023.47,3091.53 2065,3050 U3_A.4
REG1_B: TP1_B.2 U3_B.4 U5_B.3 | length 641.4
  Bottom Layer w8: TP1_B.2 U5_B.3 1635,1915 1830,1915 1853.47,1891.53 2023.47,1891.53 2065,1850 U3_B.4
REG2: TP2.3 U7.5 U11.4 | length 641.4
  Bottom Layer w8: TP2.3 U11.4 3735,1815 3930,1815 3953.47,1791.53 4123.47,1791.53 4165,1750 U7.5
REG2_A: TP1_A.3 U3_A.5 U5_A.4 | length 641.4
  Bottom Layer w8: TP1_A.3 U5_A.4 1635,3015 1830,3015 1853.47,2991.53 2023.47,2991.53 2065,2950 U3_A.5
REG2_B: TP1_B.3 U3_B.5 U5_B.4 | length 641.4
  Bottom Layer w8: TP1_B.3 U5_B.4 1635,1815 1830,1815 1853.47,1791.53 2023.47,1791.53 2065,1750 U3_B.5
REG3: TP2.4 U7.6 U11.5 | length 641.4
  Bottom Layer w8: TP2.4 U11.5 3895,1750 3930,1715 3953.47,1691.53 4123.47,1691.53 4165,1650 U7.6
REG3_A: TP1_A.4 U3_A.6 U5_A.5 | length 641.4
  Bottom Layer w8: TP1_A.4 U5_A.5 1635,2915 1830,2915 1853.47,2891.53 2023.47,2891.53 2065,2850 U3_A.6
REG3_B: TP1_B.4 U3_B.6 U5_B.5 | length 641.4
  Bottom Layer w8: TP1_B.4 U5_B.5 1635,1715 1830,1715 1853.47,1691.53 2023.47,1691.53 2065,1650 U3_B.6
REG4: TP2.5 U8.3 U11.6 | length 1667.8
  Top Layer w8: U8.3 4820,1830 v2(4820,1590)
  Bottom Layer w8: TP2.5 U11.6 3895,1650 3953.47,1591.53 4460.17,1591.53 4476.17,1607.53 4523.83,1607.53 4539.83,1591.53 4740.62,1591.53 4742.15,1590 v2(4820,1590)
REG4_A: TP1_A.5 U4_A.3 U5_A.6 | length 1660.7
  Top Layer w8: U4_A.3 2705,3045 2705,2790 v2(2710,2785)
  Bottom Layer w8: TP1_A.5 U5_A.6 1635,2815 1830,2815 1853.47,2791.53 2360.17,2791.53 2376.17,2807.53 2423.83,2807.53 2439.83,2791.53 2703.47,2791.53 v2(2710,2785)
REG4_B: TP1_B.5 U4_B.3 U5_B.6 | length 1660.7
  Top Layer w8: U4_B.3 2705,1845 2705,1590 v2(2710,1585)
  Bottom Layer w8: TP1_B.5 U5_B.6 1635,1615 1830,1615 1853.47,1591.53 2360.17,1591.53 2376.17,1607.53 2423.83,1607.53 2439.83,1591.53 2703.47,1591.53 v2(2710,1585)
REG5: TP2.6 U8.4 U11.7 | length 1640.4
  Top Layer w8: U8.4 4795,1755 v2(4795,1475)
  Bottom Layer w8: TP2.6 U11.7 3735,1515 3930,1515 3953.47,1491.53 4745.34,1491.53 4761.87,1475 v2(4795,1475)
REG5_A: TP1_A.6 U4_A.4 U5_A.7 | length 1619.2
  Top Layer w8: U4_A.4 2685,2965 2685,2690 v2(2690,2685)
  Bottom Layer w8: TP1_A.6 U5_A.7 1635,2715 1830,2715 1853.47,2691.53 2683.47,2691.53 v2(2690,2685)
REG5_B: TP1_B.6 U4_B.4 U5_B.7 | length 1619.2
  Top Layer w8: U4_B.4 2685,1765 2685,1490 v2(2690,1485)
  Bottom Layer w8: TP1_B.6 U5_B.7 1635,1515 1830,1515 1853.47,1491.53 2683.47,1491.53 v2(2690,1485)
REG6: TP2.7 U8.5 U11.8 | length 1590.9
  Top Layer w8: U8.5 4770,1680 v2(4770,1385)
  Bottom Layer w8: TP2.7 U11.8 3735,1415 3930,1415 3953.47,1391.53 4559.12,1391.53 4565.65,1385 v2(4770,1385)
REG6_A: TP1_A.7 U4_A.5 U5_A.8 | length 1590.9
  Top Layer w8: U4_A.5 2665,2885 2665,2590 v2(2670,2585)
  Bottom Layer w8: TP1_A.7 U5_A.8 1635,2615 1876.27,2615 1882.8,2608.47 1917.2,2608.47 2044.74,2608.47 2061.69,2591.53 2663.47,2591.53 v2(2670,2585)
REG6_B: TP1_B.7 U4_B.5 U5_B.8 | length 1598
  Top Layer w8: U4_B.5 2667,1683 2667,1379 v2(2668,1378)
  Bottom Layer w8: TP1_B.7 U5_B.8 1635,1415 1830,1415 1853.47,1391.53 2056.56,1391.53 2070.09,1378 v2(2668,1378)
REG7: TP2.8 U8.6 U11.9 | length 1545.9
  Top Layer w8: U8.6 4745,1605 v2(4745,1292.32)
  Bottom Layer w8: TP2.8 U11.9 3735,1315 3930,1315 3953.47,1291.53 4744.2,1291.53 v2(4745,1292.32)
REG7_A: TP1_A.8 U4_A.6 U5_A.9 | length 1555.6
  Top Layer w8: U4_A.6 2645,2805 v2(2645,2485)
  Bottom Layer w8: TP1_A.8 U5_A.9 1635,2515 1830,2515 1853.47,2491.53 2638.47,2491.53 v2(2645,2485)
REG7_B: TP1_B.8 U4_B.6 U5_B.9 | length 1555.6
  Top Layer w8: U4_B.6 2645,1605 v2(2645,1285)
  Bottom Layer w8: TP1_B.8 U5_B.9 1635,1350 1670,1315 1830,1315 1853.47,1291.53 2638.47,1291.53 v2(2645,1285)
REG8: TP3.1 U9.3 U12.2 | length 641.4
  Bottom Layer w8: TP3.1 U12.2 3735,3215 3930,3215 3953.47,3191.53 4123.47,3191.53 4165,3150 U9.3
REG9: TP3.2 U9.4 U12.3 | length 641.4
  Bottom Layer w8: TP3.2 U12.3 3735,3115 3930,3115 3953.47,3091.53 4123.47,3091.53 4165,3050 U9.4
REG10: TP3.3 U9.5 U12.4 | length 641.4
  Bottom Layer w8: TP3.3 U12.4 3735,3015 3930,3015 3953.47,2991.53 4123.47,2991.53 4165,2950 U9.5
REG11: TP3.4 U9.6 U12.5 | length 641.4
  Bottom Layer w8: TP3.4 U12.5 3735,2915 3930,2915 3953.47,2891.53 4123.47,2891.53 4165,2850 U9.6
REG12: TP3.5 U10.3 U12.6 | length 1660.7
  Top Layer w8: U10.3 4805,3045 4805,2790 v2(4810,2785)
  Bottom Layer w8: TP3.5 U12.6 3735,2815 3930,2815 3953.47,2791.53 4460.17,2791.53 4476.17,2807.53 4523.83,2807.53 4539.83,2791.53 4744.45,2791.53 4750.98,2785 v2(4810,2785)
REG13: TP3.6 U10.4 U12.7 | length 1619.2
  Top Layer w8: U10.4 4785,2965 4785,2690 v2(4790,2685)
  Bottom Layer w8: TP3.6 U12.7 3735,2715 3930,2715 3953.47,2691.53 4754.39,2691.53 4760.92,2685 v2(4790,2685)
REG14: TP3.7 U10.5 U12.8 | length 1600.8
  Top Layer w8: U10.5 4765,2885 4765,2677.47 4770,2672.47 v2(4770,2578)
  Bottom Layer w8: TP3.7 U12.8 3735,2615 3976.27,2615 3982.8,2608.47 4132.22,2608.47 4149.17,2591.53 4625.83,2591.53 4639.36,2578 v2(4770,2578)
REG15: TP3.8 U10.6 U12.9 | length 1555.6
  Top Layer w8: U10.6 4745,2805 v2(4745,2485)
  Bottom Layer w8: TP3.8 U12.9 3735,2515 3930,2515 3953.47,2491.53 4738.47,2491.53 v2(4745,2485)
RST: U3_A.15 U3_B.15 U4_A.15 U4_B.15 U7.15 U8.15 U9.15 U10.15 U14.2 | length 6254.9
  Top Layer w8: U3_B.15 2450,2100 2450,3200 U3_A.15 ; U7.15 4550,2100 4550,3200 U9.15
  Bottom Layer w8: U3_B.15 2541.27,2050 2582.8,2091.53 2617.2,2091.53 2658.73,2050 U4_B.15 ; U3_A.15 2541.27,3250 2582.8,3291.53 2617.2,3291.53 2658.73,3250 U4_A.15 U14.2 3341.27,3250 3382.8,3291.53 4217.2,3291.53 4258.73,3250 U9.15 4641.27,3250 4682.8,3291.53 4717.2,3291.53 4758.73,3250 U10.15 ; U7.15 4641.27,2050 4682.8,2091.53 4717.2,2091.53 4758.73,2050 U8.15
RST#: P1.4 TP7.1 U14.1 | length 6203.9
  Top Layer w8: P1.4 1192.12,1592.12 1192.12,3067.56 1200,3075.43 v2(1200,3450.26)
  Bottom Layer w8: v2(1200,3450.26) 1549.74,3450.26 1600,3400 3050,3400 U14.1 3150,3400 TP7.1
VCC: C3_A.1 C3_B.1 C4_A.1 C4_B.1 C5_A.1 C5_B.1 C6.1 C7.1 C8.1 C9.1 C10.1 C11.1 C12.1 C14.1 C99.1 P1.1 TP5.1 U3_A.16 U3_B.16 U4_A.16 U4_B.16 U5_A.1 U5_A.20 U5_B.1 U5_B.20 U6.14 U7.16 U8.16 U9.16 U10.16 U11.1 U11.20 U12.1 U12.20 U14.14 | length 17612.1
  Top Layer w20: U5_B.1 1600,2342.61 v1(1600,2343) ; U5_A.1 v1(1600,3543) ; U5_B.20 C5_B.1 ; U5_A.20 C5_A.1 ; U3_B.16 C3_B.1 ; U3_A.16 C3_A.1 ; U4_B.16 C4_B.1 ; U4_A.16 C4_A.1 ; U6.14 C6.1 ; U14.14 C14.1 ; U11.1 v1@3700,2342.61 ; U12.1 v1@3700,3542.61 ; U11.20 C11.1 ; U12.20 C12.1 ; U7.16 C7.1 ; U9.16 C9.1 ; U8.16 C8.1 ; U10.16 C10.1 ; v1(5225,1150) TP5.1 v1(5225,3525)
  Bottom Layer w20: P1.1 1175,1125 5200,1125 v1(5225,1150) ; C99.1 1528.74,3421.26 U5_A.1 ; v1(1600,2343) 1600,2342.61 1857.39,2342.61 C5_B.1 1942.61,2342.61 2357.39,2342.61 C3_B.1 2442.61,2342.61 2857.39,2342.61 C4_B.1 2942.61,2342.61 3357.39,2342.61 C6.1 3442.61,2342.61 v1(3699.84,2342.61) 3957.39,2342.61 C11.1 4042.61,2342.61 4457.39,2342.61 C7.1 4542.61,2342.61 4957.39,2342.61 C8.1 TP5.1 ; v1(1600,3543) 1600,3542.61 1857.39,3542.61 C5_A.1 1942.61,3542.61 2357.39,3542.61 C3_A.1 2442.61,3542.61 2857.39,3542.61 C4_A.1 2942.61,3542.61 3357.39,3542.61 C14.1 3442.61,3542.61 3957.39,3542.61 C12.1 4042.61,3542.61 4457.39,3542.61 C9.1 4542.61,3542.61 4957.39,3542.61 C10.1 5025,3525 v1(5225,3525)
  other v1: 3699.84,3542.61
pads on no net: P1.20 U14.8 U14.10 U14.12

## Polygon pours and split planes (outlines as drawn)
GND on Top Layer "GND_L01_P000" (solid, remove dead copper, pour order 0): 1000,1000 1000,3700 6200,3700 6200,1000
GND on Bottom Layer "GND_L02_P001" (solid, remove dead copper, pour order 1): 1000,1000 1000,3700 6200,3700 6200,1000

## Keep-outs
Top Layer:
  rectangle: 1000,3600 6050,3700
  rectangle: 1000,1000 6050,1100
Bottom Layer:
  rectangle: 1000,1000 6050,1100
  rectangle: 1000,3600 6050,3700
Keep-Out Layer:
  the board outline again, w20

## Silkscreen, mask and mechanical layers (free items; w line width, h text height)
Top Overlay:
  lines w5: 1050,3600 6000,3600 ; 1175,1100 6000,1100
  text "Register / .print_date / Rev A / E. SIMS" at 5706.91,1200 h45 r90
Bottom Overlay:
  lines w5: 1050,1100 6000,1100 ; 1050,3600 6000,3600

## Text inside footprints (layer, text, board x,y; h text height)
C99: Top Overlay "+" at 1090.64,3355.85 h40 r270